# Altium PCB Micro2440.PcbDoc
Units mil, origin at the board's own origin, x right, y up, seen from the top; angles counter-clockwise.
Board outline 4405 x 3640 mil, 2 copper layers (Top Layer, Bottom Layer); 56 components, 199 nets, 469 pads, 31 vias.
Unrouted connection lines stored in the file: 177.
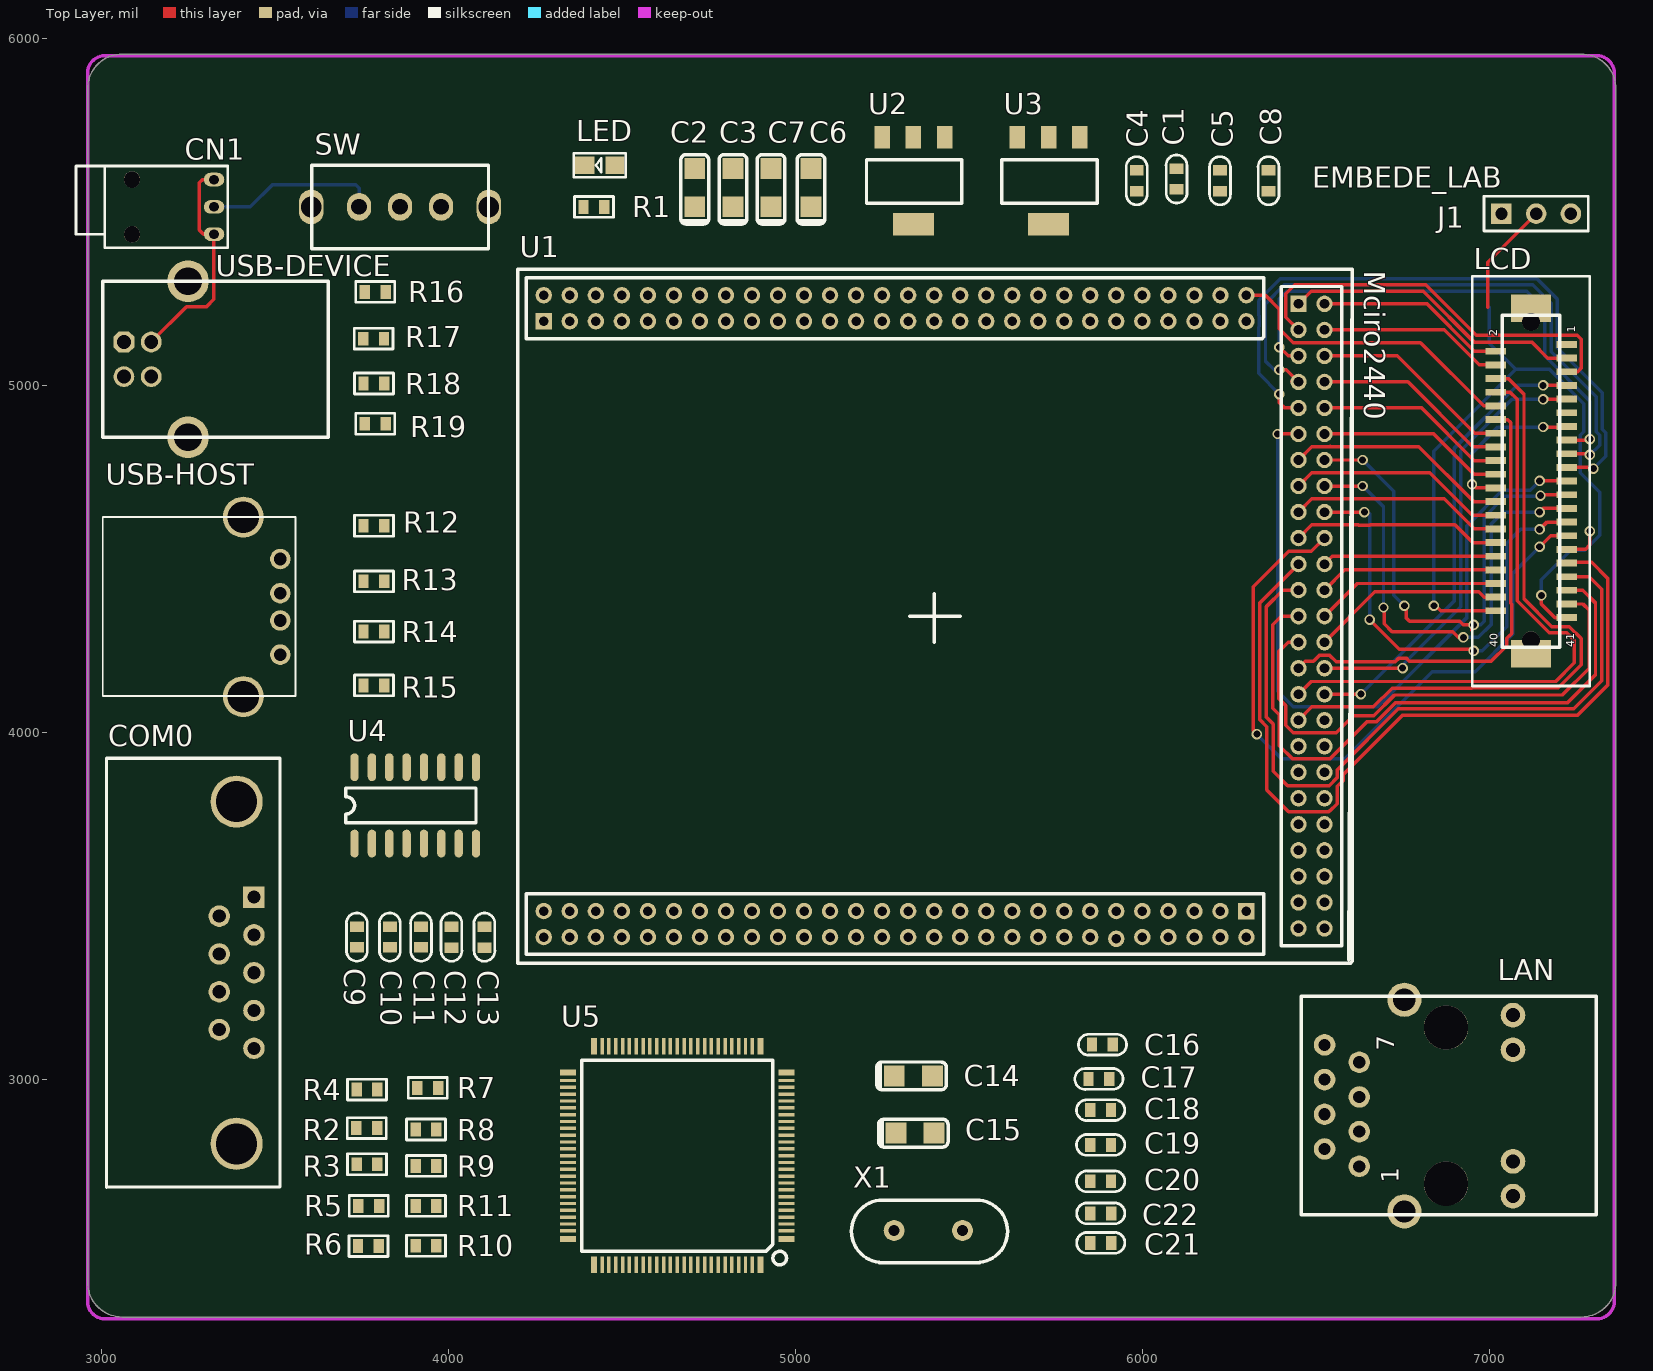
[diagram p0: Top Layer view]
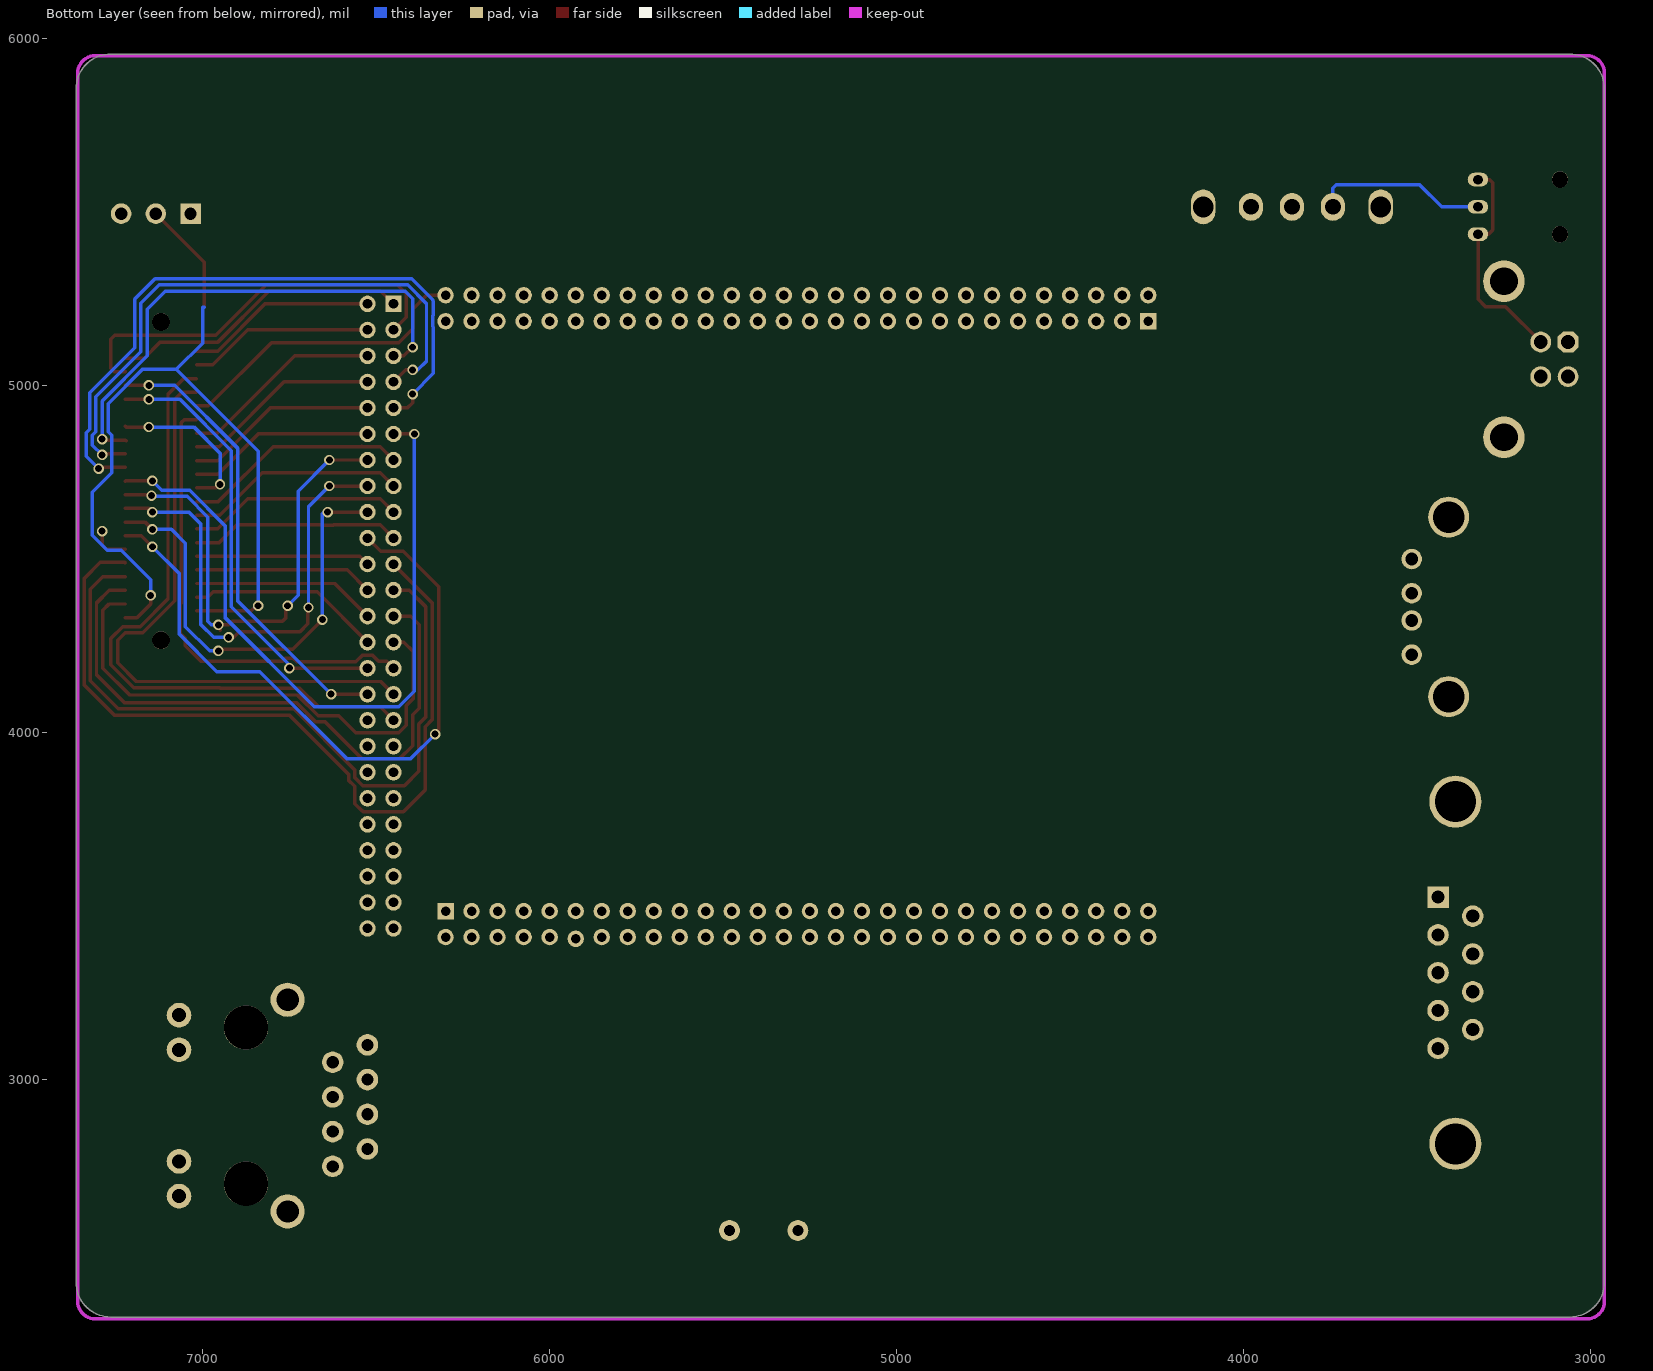
[diagram p1: Bottom Layer view, seen from below]

## Layer stack, top to bottom
Top Layer: signal copper 1.4
Dielectric: dielectric 12.6, FR-4, Dk 4.8
Bottom Layer: signal copper 1.4

## Board outline
2960,4850 2960,5855 cw(c3060,5855) 3060,5955 6735,5955 7265,5955 cw(c7265,5855) 7365,5855 7365,2745 7365,2415 cw(c7265,2415) 7265,2315 3155,2315 3060,2315 cw(c3060,2415) 2960,2415 2960,4840

## Design rules (kind name [scope] priority, off if disabled: settings)
Clearance [All] p1: gap=8
PolygonConnect [All] p1: connectstyle=Relief reliefconductorwidth=10 reliefentries=4 polygonreliefangle="90 Angle"
RoutingVias [All] p1: holewidth=28 width=50 viastyle="Through Hole" minholewidth=25 minwidth=40 maxholewidth=28 maxwidth=50
SMDNeckDown [All] p1: percent=80.000
SilkscreenOverComponentPads [All] p1: minsilkscreentomaskgap=10
SolderMaskExpansion [All] p1: expansion=4
Width [All] p1: maxlimit=10 minlimit=8 preferedwidth=10
27 further rules are at their usual default settings.

## Components (designator, comment, footprint, x,y, rotation, side; value= is the part's Value field where it differs from the comment)
C1 "Cap" 0603A 6100,5565 r90 top
C2 "Cap2" C3216 4710,5515 r0 top
C3 "Cap2" C3216 4820,5515 r0 top
C4 "Cap" 0603A 5985,5560 r90 top
C5 "Cap" 0603A 6225,5560 r90 top
C6 "Cap2" C3216 5045,5515 r0 top
C7 "Cap2" C3216 4930,5515 r0 top
C8 "Cap" 0603A 6365,5560 r90 top
C9 "Cap Semi" 0603A 3735,3440 r270 top
C10 "Cap Semi" 0603A 3830,3440 r270 top
C11 "Cap Semi" 0603A 3920,3440 r270 top
C12 "Cap Semi" 0603A 4010,3380 r90 top
C13 "Cap Semi" 0603A 4105,3380 r90 top
C14 "10uF" C3216 5285,3010 r270 top
C15 "10uF" C3216 5290,2845 r270 top
C16 "0.1uF" 0603A 5855.26,3098.79 r0 top
C17 "0.1uF" 0603A 5845,3000 r0 top
C18 "22p" 0603A 5850,2910 r0 top
C19 "22p" 0603A 5850,2810 r0 top
C20 "0.1u" 0603A 5850,2705 r0 top
C21 "104" 0603A 5910,2530 r180 top
C22 "104" 0603A 5910,2615 r180 top
CN1 "DC_JACK" DC25 3010,5515 r270 top
COM0 "" DB9RA/M 3440,3525 r90 top
J1 "" HDR1X3 7035,5495 r0 top
LAN "HR911103A" HR911103A 6875,2925 r270 top
LCD "LCD41P" DF9B-41P-1V2 7120,4265 r90 top
LED "POWER" LED 4480,5635 r180 top
R1 "500" 0603R 4450,5515 r180 top
R2 "4.7K" 0603R 3795,2860 r180 top
R3 "0" 0603R 3735,2755 r0 top
R4 "50" 0603R 3735,2970 r0 top
R5 "50" 0603R 3740,2635 r0 top
R6 "50" 0603R 3800,2520 r180 top
R7 "50" 0603R 3910,2975 r0 top
R8 "1K" 0603R 3905,2855 r0 top
R9 "1K" 0603R 3905,2750 r0 top
R10 "4.7K" 0603R 3905,2520 r0 top
R11 "6.8K" 0603R 3905,2635 r0 top
R12 "22" 0603R 3755,4595 r0 top
R13 "22" 0603R 3755,4435 r0 top
R14 "15K" 0603R 3755,4290 r0 top
R15 "15K" 0603R 3755,4135 r0 top
R16 "1.5K" 0603R 3820,5270 r180 top
R17 "22" 0603R 3815,5135 r180 top
R18 "22" 0603R 3755,5005 r0 top
R19 "470K" 0603R 3820,4890 r180 top
SW "CON5" SW35 3860,5515 r90 top
U1 "Micro2440" Micro2440 4275,5185 r0 top
U2 "LM1117-3.3V" SOT223S 5250,5715 r270 top
U3 "LM1117-1.8V" SOT223S 5640,5715 r270 top
U4 "MAX3232SOP" SSOP16 3730,3680 r180 top
U5 "DM9000" QFP100 4975,2540 r90 top
USB-DEVICE "USB Port B type" USB-B 3065,5125 r90 top
USB-HOST "USB Port A type" USB-A 3515,4500 r270 top
X1 "25M" OSC2PR-1 5285,2565 r0 top

## Footprints (in the part's own frame and the unit in brackets; to place one, negate y for a bottom-side part, rotate by r counter-clockwise, add the part's x,y. Pads: shape width x height; smd on the part's side, far side on the other; paste and mask are expansions set on the pad)
0603A [mil]
  rect 30x40 smd: 1(-0.26,1.21) 2(59.74,1.21)
  silkscreen extent -40,-29 99,31
0603R [mil]
  rect 30x40 smd: 1(0.47,0.42) 2(60.47,0.42)
  silkscreen extent -26,-30 87,30
C3216 [mil]
  rect 60x60 smd: 1(0,0) 2(0,110)
  silkscreen extent -40,-50 40,150
DB9RA/M [mil]
  rect 62x62 hole 38: 1(0.38,0.31)
  round 62 hole 38: 2(-108.62,0.31) 3(-217.62,0.31) 4(-326.62,0.31) 5(-435.62,0.31) 6(-54.62,100.31) 7(-163.62,100.31) 8(-272.62,100.31) 9(-381.62,100.31)
  round 150 hole 118.11: ""(-710.62,50.31) ""(275.38,50.31)
  silkscreen extent -836,-75 400,425
DC25 [mm]
  oval 1x1.5 hole 0.7: 1(2.012,7.989) 2(0.012,7.989) 3(-1.988,7.989)
  round 1.2 hole 1.2: A(-1.988,1.989) B(2.012,1.989)
  silkscreen extent -2.99,-2.11 3.01,8.99
DF9B-41P-1V2 [mm]
  rect 0.5x1.5 smd: 1(21.667,-2.605) 2(21.167,2.595) 3(20.667,-2.605) 4(20.167,2.595) 5(19.667,-2.605) 6(19.167,2.595) 7(18.667,-2.605) 8(18.167,2.595) 9(17.667,-2.605) 10(17.167,2.595) 11(16.667,-2.605) 12(16.167,2.595) 13(15.667,-2.605) 14(15.167,2.595) 15(14.667,-2.605) 16(14.167,2.595) 17(13.667,-2.605) 18(13.167,2.595) 19(12.667,-2.605) 20(12.167,2.595) 21(11.667,-2.605) 22(11.167,2.595) 23(10.667,-2.605) 24(10.167,2.595) 25(9.667,-2.605) 26(9.167,2.595) 27(8.667,-2.605) 28(8.167,2.595) 29(7.667,-2.605) 30(7.167,2.595) 31(6.667,-2.605) 32(6.167,2.595) 33(5.667,-2.605) 34(5.167,2.595) 35(4.667,-2.605) 36(4.167,2.595) 37(3.667,-2.605) 38(3.167,2.595) 39(2.667,-2.605) 40(2.167,2.595) 41(1.667,-2.605)
  round 1.3 hole 1.3: A(0.017,-0.005) B(23.317,-0.005)
  rect 2x2.9 smd: C(-0.983,-0.005) D(24.317,-0.005)
  silkscreen extent -3.33,-4.31 26.67,4.3
HDR1X3 [mm] "Connector; Header; 3 Position"
  rect 1.5x1.5 hole 0.9: 1(0,0)
  round 1.5 hole 0.9: 2(2.54,0) 3(5.08,0)
  silkscreen extent -1.27,-1.27 6.35,1.27
HR911103A [mil]
  round 62 hole 35: 1(175.67,-249.76) 2(125.67,-349.76) 3(75.67,-249.76) 4(25.67,-349.76) 5(-24.33,-249.76) 6(-74.33,-349.76) 7(-124.33,-249.76) 8(-174.33,-349.76)
  round 70.87 hole 40.16: 9(261.5,193.16) 10(161.5,193.16) 11(-160.16,193.16) 12(-260.16,193.16)
  round 98.42 hole 64.17: A(305.59,-119.83) B(-304.25,-119.83)
  round 127.95 hole 127.95: C(-224.33,0.24) D(225.67,0.24)
  silkscreen extent -314,-416 316,433
LED [mil]
  rect 55.12x50 smd: 1(-0.13,0.5) 2(86.87,0.5)
  silkscreen extent -32,-35 118,36
Micro2440 [mm]
  rect 1.2x1.2 hole 0.7: PA1(0,0) PB1(55.245,1.27) PC1(51.435,-43.18)
  round 1.2 hole 0.7: PA2(0,1.905) PA3(1.905,0) PA4(1.905,1.905) PA5(3.81,0) PA6(3.81,1.905) PA7(5.715,0) PA8(5.715,1.905) PA9(7.62,0) PA10(7.62,1.905) PA11(9.525,0) PA12(9.525,1.905) PA13(11.43,0) PA14(11.43,1.905) PA15(13.335,0) PA16(13.335,1.905) PA17(15.24,0) PA18(15.24,1.905) PA19(17.145,0) PA20(17.145,1.905) PA21(19.05,0) PA22(19.05,1.905) PA23(20.955,0) PA24(20.955,1.905) PA25(22.86,0) PA26(22.86,1.905) PA27(24.765,0) PA28(24.765,1.905) PA29(26.67,0) PA30(26.67,1.905) PA31(28.575,0) PA32(28.575,1.905) PA33(30.48,0) PA34(30.48,1.905) PA35(32.385,0) PA36(32.385,1.905) PA37(34.29,0) PA38(34.29,1.905) PA39(36.195,0) PA40(36.195,1.905) PA41(38.1,0) PA42(38.1,1.905) PA43(40.005,0) PA44(40.005,1.905) PA45(41.91,0) PA46(41.91,1.905) PA47(43.815,0) PA48(43.815,1.905) PA49(45.72,0) PA50(45.72,1.905) PA51(47.625,0) PA52(47.625,1.905) PA53(49.53,0) PA54(49.53,1.905) PA55(51.435,0) PA56(51.435,1.905) PB2(57.15,1.27) PB3(55.245,-0.635) PB4(57.15,-0.635) PB5(55.245,-2.54) PB6(57.15,-2.54) PB7(55.245,-4.445) PB8(57.15,-4.445) PB9(55.245,-6.35) PB10(57.15,-6.35) PB11(55.245,-8.255) PB12(57.15,-8.255) PB13(55.245,-10.16) PB14(57.15,-10.16) PB15(55.245,-12.065) PB16(57.15,-12.065) PB17(55.245,-13.97) PB18(57.15,-13.97) PB19(55.245,-15.875) PB20(57.15,-15.875) PB21(55.245,-17.78) PB22(57.15,-17.78) PB23(55.245,-19.685) PB24(57.15,-19.685) PB25(55.245,-21.59) PB26(57.15,-21.59) PB27(55.245,-23.495) PB28(57.15,-23.495) PB29(55.245,-25.4) PB30(57.15,-25.4) PB31(55.245,-27.305) PB32(57.15,-27.305) PB33(55.245,-29.21) PB34(57.15,-29.21) PB35(55.245,-31.115) PB36(57.15,-31.115) PB37(55.245,-33.02) PB38(57.15,-33.02) PB39(55.245,-34.925) PB40(57.15,-34.925) PB41(55.245,-36.83) PB42(57.15,-36.83) PB43(55.245,-38.735) PB44(57.15,-38.735) PB45(55.245,-40.64) PB46(57.15,-40.64) PB47(55.245,-42.545) PB48(57.15,-42.545) PB49(55.245,-44.45) PB50(57.15,-44.45) PC2(51.435,-45.085) PC3(49.53,-43.18) PC4(49.53,-45.085) PC5(47.625,-43.18) PC6(47.625,-45.085) PC7(45.72,-43.18) PC8(45.72,-45.085) PC9(43.815,-43.18) PC10(43.815,-45.085) PC11(41.91,-43.18) PC12(41.91,-45.212) PC13(40.005,-43.18) PC14(40.005,-45.085) PC15(38.1,-43.18) PC16(38.1,-45.085) PC17(36.195,-43.18) PC18(36.195,-45.085) PC19(34.29,-43.18) PC20(34.29,-45.085) PC21(32.385,-43.18) PC22(32.385,-45.085) PC23(30.48,-43.18) PC24(30.48,-45.085) PC25(28.575,-43.18) PC26(28.575,-45.085) PC27(26.67,-43.18) PC28(26.67,-45.085) PC29(24.765,-43.18) PC30(24.765,-45.085) PC31(22.86,-43.18) PC32(22.86,-45.085) PC33(20.955,-43.18) PC34(20.955,-45.085) PC35(19.05,-43.18) PC36(19.05,-45.085) PC37(17.145,-43.18) PC38(17.145,-45.085) PC39(15.24,-43.18) PC40(15.24,-45.085) PC41(13.335,-43.18) PC42(13.335,-45.085) PC43(11.43,-43.18) PC44(11.43,-45.085) PC45(9.525,-43.18) PC46(9.525,-45.085) PC47(7.62,-43.18) PC48(7.62,-45.085) PC49(5.715,-43.18) PC50(5.715,-45.085) PC51(3.81,-43.18) PC52(3.81,-45.085) PC53(1.905,-43.18) PC54(1.905,-45.085) PC55(0,-43.18) PC56(0,-45.085)
  silkscreen extent -1.91,-46.99 59.18,3.81
OSC2PR-1 [mil]
  round 60 hole 32: 1(-0.31,-0.47) 2(196.69,-0.47)
  silkscreen extent -123,-93 327,87
QFP100 [mm]
  rect 0.45x1.2 smd: 1(-0.002,0.012) 25(12.198,0.012) 51(12.198,16.012) 75(-0.002,16.012)
  rect 0.25x1.2 smd: 2(0.598,0.012) 3(1.098,0.012) 4(1.598,0.012) 5(2.098,0.012) 6(2.598,0.012) 7(3.098,0.012) 8(3.598,0.012) 9(4.098,0.012) 10(4.598,0.012) 11(5.098,0.012) 12(5.598,0.012) 13(6.098,0.012) 14(6.598,0.012) 15(7.098,0.012) 16(7.598,0.012) 17(8.098,0.012) 18(8.598,0.012) 19(9.098,0.012) 20(9.598,0.012) 21(10.098,0.012) 22(10.598,0.012) 23(11.098,0.012) 24(11.598,0.012) 52(11.598,16.012) 53(11.098,16.012) 54(10.598,16.012) 55(10.098,16.012) 56(9.598,16.012) 57(9.098,16.012) 58(8.598,16.012) 59(8.098,16.012) 60(7.598,16.012) 61(7.098,16.012) 62(6.598,16.012) 63(6.098,16.012) 64(5.598,16.012) 65(5.098,16.012) 66(4.598,16.012) 67(4.098,16.012) 68(3.598,16.012) 69(3.098,16.012) 70(2.598,16.012) 71(2.098,16.012) 72(1.598,16.012) 73(1.098,16.012) 74(0.598,16.012)
  rect 1.2x0.45 smd: 26(14.098,1.912) 50(14.098,14.112) 76(-1.902,14.112) 100(-1.902,1.912)
  rect 1.2x0.25 smd: 27(14.098,2.512) 28(14.098,3.012) 29(14.098,3.512) 30(14.098,4.012) 31(14.098,4.512) 32(14.098,5.012) 33(14.098,5.512) 34(14.098,6.012) 35(14.098,6.512) 36(14.098,7.012) 37(14.098,7.512) 38(14.098,8.012) 39(14.098,8.512) 40(14.098,9.012) 41(14.098,9.512) 42(14.098,10.012) 43(14.098,10.512) 44(14.098,11.012) 45(14.098,11.512) 46(14.098,12.012) 47(14.098,12.512) 48(14.098,13.012) 49(14.098,13.512) 77(-1.902,13.512) 78(-1.902,13.012) 79(-1.902,12.512) 80(-1.902,12.012) 81(-1.902,11.512) 82(-1.902,11.012) 83(-1.902,10.512) 84(-1.902,10.012) 85(-1.902,9.512) 86(-1.902,9.012) 87(-1.902,8.512) 88(-1.902,8.012) 89(-1.902,7.512) 90(-1.902,7.012) 91(-1.902,6.512) 92(-1.902,6.012) 93(-1.902,5.512) 94(-1.902,5.012) 95(-1.902,4.512) 96(-1.902,4.012) 97(-1.902,3.512) 98(-1.902,3.012) 99(-1.902,2.512)
  silkscreen extent -1.9,0.01 13.1,15.01
SOT223S [mil]
  rect 65x45 smd: 1(0,0) 2(0,90) 3(0,180)
  rect 65x118 smd: 4(250,90)
  silkscreen extent 65,-45 190,230
SSOP16 [mil]
  oval 24x80 smd: 1(0.44,0.31) 2(-49.56,0.31) 3(-99.56,0.31) 4(-149.56,0.31) 5(-199.56,0.31) 6(-249.56,0.31) 7(-299.56,0.31) 8(-349.56,0.31) 9(-349.56,-219.69) 10(-299.56,-219.69) 11(-249.56,-219.69) 12(-199.56,-219.69) 13(-149.56,-219.69) 14(-99.56,-219.69) 15(-49.56,-219.69) 16(0.44,-219.69)
  silkscreen extent -350,-160 25,-60
SW35 [mil]
  oval 100x70 hole 60: 1(-0.65,255.25) 5(-0.65,-256.57)
  oval 80x70 hole 45: 2(-0.65,117.45) 3(-0.65,-0.66) 4(-0.65,-118.77)
  silkscreen extent -121,-256 119,254
USB-A [mm]
  round 1.5 hole 0.92: 1(0.009,0.013) 2(2.509,0.013) 3(4.509,0.013) 4(7.009,0.013)
  round 3 hole 2.3: 5(10.079,-2.697) 6(-3.061,-2.697)
  silkscreen extent -3.06,-12.98 10.04,1.12
USB-B [mil]
  oct 60x60 hole 40: 1(0.24,0.17)
  round 60 hole 40: 2(-99.76,0.17) 3(-99.76,-78.57) 4(0.24,-78.57)
  round 120 hole 80: 5(175.24,-184.87) 6(-274.76,-184.87)
  silkscreen extent -275,-589 175,61

## Part data
C1 C2 C3 C4 C5 C6 C7 C8: "Capacitor"
C9 C10 C11 C12 C13: "Capacitor (Semiconductor SIM Model)"
C14 C15: library part ELECTRO1
C16 C17 C18 C19 C20: library part CAP
C21 C22: library part "CAP NP_0"
CN1: library part CON3
COM0: library part "CONNECTOR DB9"
J1: library part "Header 3", "Header, 3-Pin"
LED: library part LED3, "Typical BLUE SiC LED"
R1 R8 R9: library part RES1
R2 R3 R4 R5 R6 R7 R11: library part RES2
R10: library part R_0
R12 R13 R14 R15 R16 R17 R18 R19: library part RESISTOR_2
SW: "Connector"
U1 U4: library part Component_1
U2 U3: library part LM1117
USB-DEVICE USB-HOST: library part USBPORT
X1: library part CRYSTAL

## Via types
v1: diameter 30, hole 20, Top Layer to Bottom Layer, 31 vias

## Nets (pads, with @x,y where several pads share a name; then routed paths per layer and width w, separated by ;. In a path a pad name is that pad's centre, name@x,y a point inside that pad or via, vN(x,y) a via of type N, cw(c..) or ccw(c..) an arc to the next point about the centre after c; other vN are vias at no path point)
AIN1: U1.PA36
AIN2: U1.PA33
ATN0: U1.PA35
CAM_PCLK: U1.PB44
CAMCLK: U1.PB43
CAMDATA0: U1.PB42
CAMDATA1: U1.PB41
CAMDATA2: U1.PB40
CAMDATA3: U1.PB39
CAMDATA4: U1.PB38
CAMDATA5: U1.PB37
CAMDATA6: U1.PB36
CAMDATA7: U1.PB35
CAMRST: U1.PB48
CDCLK: U1.PA42
CMA_HREF: U1.PB46
CMA_VSYNC: U1.PB45
DN0: R12.2 U1.PA31
DN1: R17.1 U1.PA29
DP0: R13.2 U1.PA32
DP1: R18.1 U1.PA30
EINT0: U1.PA18
EINT1: U1.PA17
EINT2: U1.PA16
EINT3: U1.PA15
EINT4: U1.PA14
EINT5: U1.PA13
EINT6: U1.PA12
EINT7: U1.PC1 U5.100
EINT8: U1.PA11
EINT9: U1.PC2
EINT11: U1.PA10
EINT13: U1.PA9
EINT14: U1.PA8
EINT15: U1.PA7
EINT16: U1.PA6
EINT17: U1.PA5
EINT18: U1.PA4
EINT19: U1.PA3
EINT20: U1.PB47
GND: C9.2 C14.2 C15.2 C16.2 C17.2 C18.2 C19.2 C20.2 C21.2 C22.2 CN1.1 CN1.3 COM0.5 LAN.4 LAN.5 LAN.A LAN.B LCD.13 LCD.22 LCD.31 LED.2 R11.1 R14.2 R15.2 R19.2 U1.PA2 U1.PB50 U1.PC56 U5.14 U5.15 U5.18 U5.19 U5.23 U5.25 U5.31 U5.32 U5.42 U5.48 U5.58 U5.63 U5.76 U5.81 U5.93 U5.94 U5.95 U5.96 U5.99 USB-DEVICE.4 USB-HOST.4 | length 1228.1
  Top Layer w10: USB-DEVICE.4 3245.32,5227 3303,5227 3324,5248 CN1.1@3324,5435.78 ; CN1.1 CN1.1@3324,5435.78 ; CN1.3 3291.26,5593.26 3282,5584 3282,5448 3294.22,5435.78 CN1.1@3324,5435.78 ; v1(6950,4715) 6960.35,4704.65 LCD.22 ; v1(7155,4880) 7220.75,4880 LCD.13 ; LCD.31 7277.49,4527.49 7290,4540 v1(7290,4580)
  Bottom Layer w10: v1(6950,4715) 6950,4805 7025,4880 v1(7155,4880)
GPB0: U1.PA45
GPB1: U1.PA46
I2CSCL: LCD.10 U1.PA56 | length 883.3
  Top Layer w10: U1.PA56 6355,5260 6395,5220 6395,5163.21 6434.83,5123.38 6801.62,5123.38 6984.13,4940.87 LCD.10
I2CSDA: LCD.11
I2SCLRCK: U1.PA40
I2SSCLK: U1.PA41
I2SSD0: U1.PA44
I2SSDI: U1.PA43
IRCSDA: U1.PA55
L3CLOCK: U1.PA39
L3DATA: U1.PA38
L3MODE: U1.PA37
LADDR0: U1.PC13
LADDR1: U1.PC15
LADDR2: U1.PC16 U5.92
LADDR3: U1.PC17
LADDR4: U1.PC18
LADDR5: U1.PC19
LADDR6: U1.PC20
LADDR7: U1.PC21
LADDR8: U1.PC22
LADDR9: U1.PC23
LADDR10: U1.PC24
LADDR11: U1.PC25
LADDR12: U1.PC26
LADDR13: U1.PC27
LADDR14: U1.PC28
LADDR15: U1.PC29
LADDR16: U1.PC30
LADDR17: U1.PC31
LADDR18: U1.PC32
LADDR19: U1.PC33
LADDR20: U1.PC34
LADDR21: U1.PC35
LADDR22: U1.PC36
LADDR23: U1.PC37
LADDR24: U1.PC38
LCD_PWR: LCD.12 U1.PB29 | length 1347.7
  Top Layer w10: U1.PB29 6470,4205 6493.21,4205 6509.83,4221.62 6540.17,4221.62 6558.79,4203 6728.4,4203 6738.4,4213 6761.6,4213 6769.6,4205 7005,4205 7050.12,4250.12 7050.12,4271.06 7057.73,4278.68 7058.68,4278.68 7065,4285 7065,4369.09 7062,4372.09 7062,4893 7053.5,4901.5 LCD.12
LCDVF0: R16.1 U1.PA27
LDATA0: U1.PC39 U5.6
LDATA1: U1.PC40 U5.7
LDATA2: U1.PC41 U5.8
LDATA3: U1.PC42 U5.9
LDATA4: U1.PC43 U5.10
LDATA5: U1.PC44 U5.11
LDATA6: U1.PC45 U5.12
LDATA7: U1.PC46 U5.13
LDATA8: U1.PC47 U5.89
LDATA9: U1.PC48 U5.88
LDATA10: U1.PC49 U5.87
LDATA11: U1.PC50 U5.86
LDATA12: U1.PC51 U5.85
LDATA13: U1.PC52 U5.84
LDATA14: U1.PC53 U5.83
LDATA15: U1.PC54 U5.82
LEND: U1.PB34
LNGCS1: U1.PC3
LNGCS2: U1.PC5
LNGCS3: U1.PC4
LNGCS4: U1.PC7 U5.3
LNOE: U1.PC9 U5.1
LNWE: U1.PC8 U5.2
LNWEBE1: U1.PC6
M_NRESET: U1.PA28
NCTS0: U1.PA53 U4.9
NETACT: LAN.10 U5.62
NetC1_2: C1.2 C2.2 C3.2 C4.2 U2.2
NetC5_2: C5.2 C6.2 C7.2 C8.2 U3.2
NetC10_1: C10.1 U4.3
NetC10_2: C10.2 U4.1
NetC11_1: C11.1 U4.5
NetC11_2: C11.2 U4.4
NetC12_1: C12.1 C13.1 U4.15
NetC12_2: C12.2 U4.2
NetC13_2: C13.2 U4.6
NetC18_1: C18.1 U5.21 X1.1
NetC19_1: C19.1 U5.22 X1.2
NetC20_1: C20.1 R6.1 R7.1
NetC21_1: C21.1 LAN.3
NetC22_1: C22.1 LAN.6
NetCN1_2: CN1.2 SW.2 | length 502.1
  Bottom Layer w10: CN1.2 3429.52,5514.52 3493,5578 3732.55,5578 3742.55,5568 SW.2
NetLAN_9: LAN.9 R8.1
NetLAN_11: LAN.11 R9.1
NetLED_1: LED.1 R1.1
NETLINK: LAN.12 R3.1
NetR2_1: R2.1 U5.67
NetR3_2: R3.2 U5.60
NetR11_2: R11.2 U5.26
NetR12_1: R12.1 R14.1 USB-HOST.2
NetR13_1: R13.1 R15.1 USB-HOST.3
NetR16_2: R16.2 R18.2 USB-DEVICE.3
NetR17_2: R17.2 R19.1 USB-DEVICE.2
NNTS0: U4.10
NRESET: U1.PC10 U5.80
NRTS0: U1.PA54
NWAIT: R10.2 U1.PC11 U5.4
NXDACK0: U1.PC12
NXDREQ0: U1.PC14
OM0: U1.PA26
RSCTS0: COM0.7 U4.8
RSRTS0: COM0.8 U4.7
RSRXD0: COM0.3 U4.13
RSTXD0: COM0.2 U4.14
RX+: LAN.8 R7.2 U5.29
RX-: LAN.7 R6.2 U5.30
RXD0: U1.PA52 U4.12
RXD1: U1.PA50
RXD2: U1.PA48
SDCLK: U1.PA20
SDCMD: U1.PA21
SDDATA0: U1.PA24
SDDATA1: U1.PA25
SDDATA2: U1.PA22
SDDATA3: U1.PA23
TSXM: LCD.5 U1.PB3 | length 1177.4
  Top Layer w10: U1.PB3 6413.38,5196.62 6413.38,5264.01 6438.99,5289.62 6816.75,5289.62 6961.96,5144.41 7253.95,5144.41 7265.1,5133.27 7265.1,5050.1 7254.3,5039.3 LCD.5 LCD.5@7223.27,5040
TSXP: LCD.4 U1.PB4 | length 534.7
  Top Layer w10: U1.PB4 6870,5160 6971.02,5058.98 LCD.4
TSYM: LCD.3 U1.PB1 | length 867.7
  Top Layer w10: U1.PB1 6486.62,5271.62 6809.29,5271.62 6955.91,5125 7122.34,5125 7168.67,5078.67 LCD.3
TSYP: LCD.2 U1.PB2 | length 549.4
  Top Layer w10: U1.PB2 6820.46,5235 6957.1,5098.35 LCD.2
TX+: LAN.1 R5.1 U5.33
TX-: LAN.2 R4.1 U5.34
TXD0: U1.PA51 U4.11
TXD1: U1.PA49
TXD2: U1.PA47
VCC: C9.1 U4.16
VCLK: LCD.6 U1.PB33 | length 1859.8
  Top Layer w10: U1.PB33 6488.38,4073.38 6665.88,4073.38 6719.8,4127.3 6949.2,4127.3 6950.53,4128.62 7198.62,4128.62 7265,4195 7265,4270.46 7230.46,4305 7180,4305 7100,4385 7100,4975 7055.39,5019.61 LCD.6
VD0: LCD.39 U1.PB27 | length 1489.9
  Top Layer w10: U1.PB27 6420,4260 6393.73,4233.73 6393.73,4096.63 6412.95,4077.41 6412.95,4020.26 6434.83,3998.38 6558.38,3998.38 6608,4048 6667.09,4048 6726.8,4107.71 7210.71,4107.71 7288,4185 7288,4352 7269.99,4370.01 LCD.39
VD1: LCD.38 U1.PB28 | length 559.2
  Top Layer w10: U1.PB28 6670,4405 6970,4405 6985.31,4389.69 LCD.38
VD2: LCD.37 U1.PB25 | length 1774.4
  Top Layer w10: U1.PB25 6400,4335 6375.73,4310.73 6375.73,4069.95 6394.95,4050.73 6394.95,3961.5 6433.07,3923.38 6540.17,3923.38 6646.79,4030 6674.54,4030 6730.54,4086 7226,4086 7306,4166 7306,4373 7269.62,4409.38 LCD.37
VD3: LCD.36 U1.PB26 | length 531.8
  Top Layer w10: U1.PB26 6619.06,4429.06 LCD.36
VD4: LCD.35 U1.PB23 | length 2077
  Top Layer w10: U1.PB23 6405,4410 6357.73,4362.73 6357.73,4043.27 6376.95,4024.05 6376.95,3888.05 6418.38,3846.62 6538.41,3846.62 6561.62,3869.83 6561.62,3891.62 6738,4068 7243,4068 7324,4149 7324,4413 7288.25,4448.75 LCD.35
VD5: LCD.34 U1.PB24 | length 517
  Top Layer w10: U1.PB24 6583.43,4468.43 LCD.34
VD6: LCD.33 U1.PB21 | length 2351.1
  Top Layer w10: U1.PB21 6338,4373 6338,4037 6358.95,4016.05 6358.95,3833.95 6421.28,3771.62 6536.62,3771.62 6538.38,3773.38 6540.17,3773.38 6561.62,3794.83 6561.62,3844.37 6579.62,3862.37 6579.62,3879.62 6750,4050 7255,4050 7342,4137 7342,4443 7295,4490 7224.45,4490 LCD.33
VD7: LCD.32 U1.PB22 | length 502.3
  Top Layer w10: U1.PB22 6547.8,4507.8 LCD.32
VD8: LCD.30 U1.PB19 | length 606.1
  Top Layer w10: U1.PB19 6488.38,4598.38 6622.88,4598.38 6624.26,4597 6655.74,4597 6657.12,4598.38 6900.97,4598.38 6952.17,4547.17 LCD.30
VD9: LCD.29 U1.PB20 | length 1983.2
  Top Layer w10: v1(6330,3995) 6320,4005 6320,4420 6421.62,4521.62 6486.62,4521.62 U1.PB20 ; v1(7145,4535) 7176.86,4566.86 LCD.29
  Bottom Layer w10: v1(6330,3995) 6401.62,3923.38 6583.38,3923.38 6835,4175 6959.6,4175 7068,4283.4 7068,4458 v1(7145,4535)
VD10: LCD.28 U1.PB17 | length 619.7
  Top Layer w10: U1.PB17 6488.38,4673.38 6869.71,4673.38 6956.54,4586.54 LCD.28
VD11: LCD.27 U1.PB18 | length 1336.3
  Top Layer w10: U1.PB18 v1(6640,4635) ; v1(6655,4325) 6740,4240 6950,4240 v1(6955,4235) ; v1(7145,4585) 7166.23,4606.23 LCD.27
  Bottom Layer w10: v1(6640,4635) 6650,4635 6655,4630 v1(6655,4325) ; v1(6955,4235) 6980,4235 7050,4305 7050,4545 7090,4585 v1(7145,4585)
VD12: LCD.26 U1.PB15 | length 634.5
  Top Layer w10: U1.PB15 6488.38,4748.38 6828.45,4748.38 6950.91,4625.91 LCD.26
VD13: LCD.25 U1.PB16 | length 1406.1
  Top Layer w10: U1.PB16 v1(6635,4710) v1@6640,4710 ; v1(6695,4360) 6697,4358 6697,4312.54 6719.54,4290 6895,4290 6911,4274 v1(6925,4274) ; v1(7145,4635) 7155.6,4645.6 LCD.25
  Bottom Layer w10: v1(6635,4710) 6695,4650 v1(6695,4360) v1@6697,4358 ; v1(6925,4274) 6968.6,4274 7005,4310.4 7005,4600 7040,4635 v1(7145,4635)
VD14: LCD.24 U1.PB13 | length 651.5
  Top Layer w10: U1.PB13 6488.38,4823.38 6540.17,4823.38 ; 6541.79,4825 6540.17,4823.38 ; LCD.24 6955.28,4665.28 6797.19,4823.38 6540.17,4823.38
VD15: LCD.23 U1.PB14 | length 1435.7
  Top Layer w10: U1.PB14 v1(6635,4785) ; v1(6755,4365) 6760,4360 6760,4330 6770,4320 6915,4320 6925,4310 6950,4310 6950,4295 ; v1@7145,4680 7149.97,4684.97 LCD.23
  Bottom Layer w10: v1(6635,4785) 6725,4695 6725,4395 v1(6755,4365) ; v1(6955,4310) 6975,4310 6985,4320 6985,4620 7045,4680 7145,4680 v1@7149.97,4684.97
  other v1: 7147.48,4682.48
VD16: LCD.21 U1.PB11 | length 2078.4
  Top Layer w10: v1(6390,4860) U1.PB11 ; v1(7145,4725) 7221.91,4725 LCD.21
  Bottom Layer w10: v1(6390,4860) 6390,4118.21 6434.83,4073.38 6677.98,4073.38 6935.6,4331 6935.6,4596.05 7037.54,4698 7118,4698 v1(7145,4725)
VD17: LCD.20 U1.PB12 | length 540.9
  Top Layer w10: U1.PB12 6840,4860 6955.98,4744.02 LCD.20
VD18: LCD.19 U1.PB9 | length 1934.5
  Top Layer w10: v1(6395,4975) 6395,4950 6410,4935 U1.PB9 ; LCD.19 7286.29,4763.71 7290,4760 v1(7300,4760)
  Bottom Layer w10: v1(6395,4975) 6335,5035 6335,5168.21 6336.62,5169.83 6336.62,5200.17 6335,5201.79 6335,5243.21 6336.62,5244.83 6336.62,5246.62 6397.62,5307.62 7137.38,5307.62 7196,5249 7196,5109 7326,4979 7326,4874.05 7336,4864.05 7336,4796 v1(7300,4760)
VD19: LCD.18 U1.PB10 | length 555.6
  Top Layer w10: U1.PB10 6805,4935 6956.61,4783.39 LCD.18
VD20: LCD.17 U1.PB7 | length 1747.8
  Top Layer w10: v1(6395,5045) 6415,5045 U1.PB7 U1.PB7@6430,5010 ; LCD.17 7286.92,4803.08 v1(7290,4800)
  Bottom Layer w10: v1(6395,5045) 6380,5045 6355,5070 6355,5235.46 6409.17,5289.62 7125.38,5289.62 7178,5237 7178,5097 7308,4967 7308,4866.6 7318,4856.6 7318,4828 v1(7290,4800)
VD21: LCD.16 U1.PB8 | length 570.4
  Top Layer w10: U1.PB8 6765.53,5010 6952.76,4822.76 LCD.16
VD22: LCD.15 U1.PB5 | length 1501.5
  Top Layer w10: v1(6395,5110) 6420,5085 U1.PB5 ; LCD.15@7220.12,4840 LCD.15 7287.45,4842.45 v1(7290,4845)
  Bottom Layer w10: v1(6395,5110) 6395,5250 6416.62,5271.62 7108.38,5271.62 7160,5220 7160,5085 7290,4955 v1(7290,4845)
VD23: LCD.14 U1.PB6 | length 585.2
  Top Layer w10: U1.PB6 6735,5085 6957.87,4862.13 LCD.14
VDD5V: C1.1 C2.1 C5.1 C6.1 J1.3 R1.2 SW.3 U1.PA1 U1.PB49 U1.PC55 U2.1 U3.1 U5.78 U5.79 USB-DEVICE.1 USB-HOST.1
VDD18V: C7.1 C8.1 U3.3 U3.4
VDD33V: C3.1 C4.1 C14.1 C15.1 C16.1 C17.1 J1.1 R2.2 R4.2 R5.2 R8.2 R9.2 R10.1 U2.3 U2.4 U5.5 U5.16 U5.17 U5.20 U5.27 U5.28 U5.35 U5.36 U5.55 U5.72 U5.73 U5.90 U5.97 U5.98
VDDLCD: J1.2 LCD.40 LCD.41 | length 2526.5
  Top Layer w10: v1@6850,4360 6859.68,4350.32 LCD.40 ; 6995,5225 6995,5355 J1.2 ; v1(7150,4395) 7150,4370 7189.36,4330.64 LCD.41
  Bottom Layer w10: v1@6850,4360 6840,4370 6840,4810 7076,5046 ; 6995,5225 7000,5225 7000,5122 7076,5046 ; v1(7150,4395) 7150,4440 7235,4525 7274.6,4525 7318,4568.4 7318,4692.4 7262,4748.4 7262,4856.6 7272,4866.6 7272,4947.54 7173.54,5046 7076,5046
  other v1: 6840,4365
VDDRTC: U1.PA34
VFRAME: LCD.8 U1.PB31 | length 1760.5
  Top Layer w10: U1.PB31 6486.62,4146.62 7191.17,4146.62 7245,4200.46 7245,4265 7223,4287 7172.54,4287 7080,4379.54 7080,4960 7059.76,4980.24 LCD.8
VLINE: LCD.7 U1.PB32 | length 1324
  Top Layer w10: U1.PB32 v1(6630,4110) ; v1(7155,5000) 7155.07,4999.93 LCD.7
  Bottom Layer w10: v1(6630,4110) 6899.6,4379.6 6899.6,4819.6 7080,5000 v1(7155,5000)
VM: LCD.9 U1.PB30 | length 1288
  Top Layer w10: U1.PB30 v1(6750,4185) v1@6750,4194.95 ; v1(7155,4960) 7222.01,4960 LCD.9
  Bottom Layer w10: v1@6750,4194.95 6917.6,4362.54 6917.6,4812.14 7065.46,4960 v1(7155,4960)
WP_SD: U1.PA19
pads on no net: CN1.A CN1.B COM0. COM0.1 COM0.4 COM0.6 COM0.9 LAN.C LAN.D LCD.1 LCD.A LCD.B LCD.C LCD.D SW.1 SW.4 SW.5 U5.24 U5.37 U5.38 U5.39 U5.40 U5.41 U5.43 U5.44 U5.45 U5.46 U5.47 U5.49 U5.50 U5.51 U5.52 U5.53 U5.54 U5.56 U5.57 U5.59 U5.61 U5.64 U5.65 U5.66 U5.68 U5.69 U5.70 U5.71 U5.74 U5.75 U5.77 U5.91 USB-DEVICE.5 USB-DEVICE.6 USB-HOST.5 USB-HOST.6

## Keep-outs
Keep-Out Layer:
  lines w10: 2960,5630 2960,5900 cw(c3010,5900) 3010,5950 7310,5950 cw(c7310,5900) 7360,5900 7360,2360 cw(c7310,2360) 7310,2310 3010,2310 cw(c3010,2360) 2960,2360 2960,5640

## Silkscreen, mask and mechanical layers (free items; w line width, h text height)
Top Overlay:
  text "EMBEDE_LAB" at 6490,5570 h60

## Text inside footprints (layer, text, board x,y; h text height)
LAN: Top Overlay "1" at 6739.37,2701.5 h50 r90; Top Overlay "7" at 6726.31,3081.78 h50 r90
LCD: Top Overlay "40" at 7024.73,4245.01 h23.62 r90; Top Overlay "41" at 7244.22,4245.99 h23.62 r90; Top Overlay "2" at 7022.76,5141.66 h23.62 r90; Top Overlay "1" at 7247.17,5151.5 h23.62 r90
U1: Top Overlay "Mciro2440" at 6640,5330 h60 r270